# Altium PCB PCB1.PcbDoc (part 5 of 6)
Units mil, origin at the board's own origin, x right, y up, seen from the top; angles counter-clockwise.
Board outline 1280 x 1960 mil, 2 copper layers (Top Layer, Bottom Layer); 45 components, 63 nets, 326 pads, 83 vias.
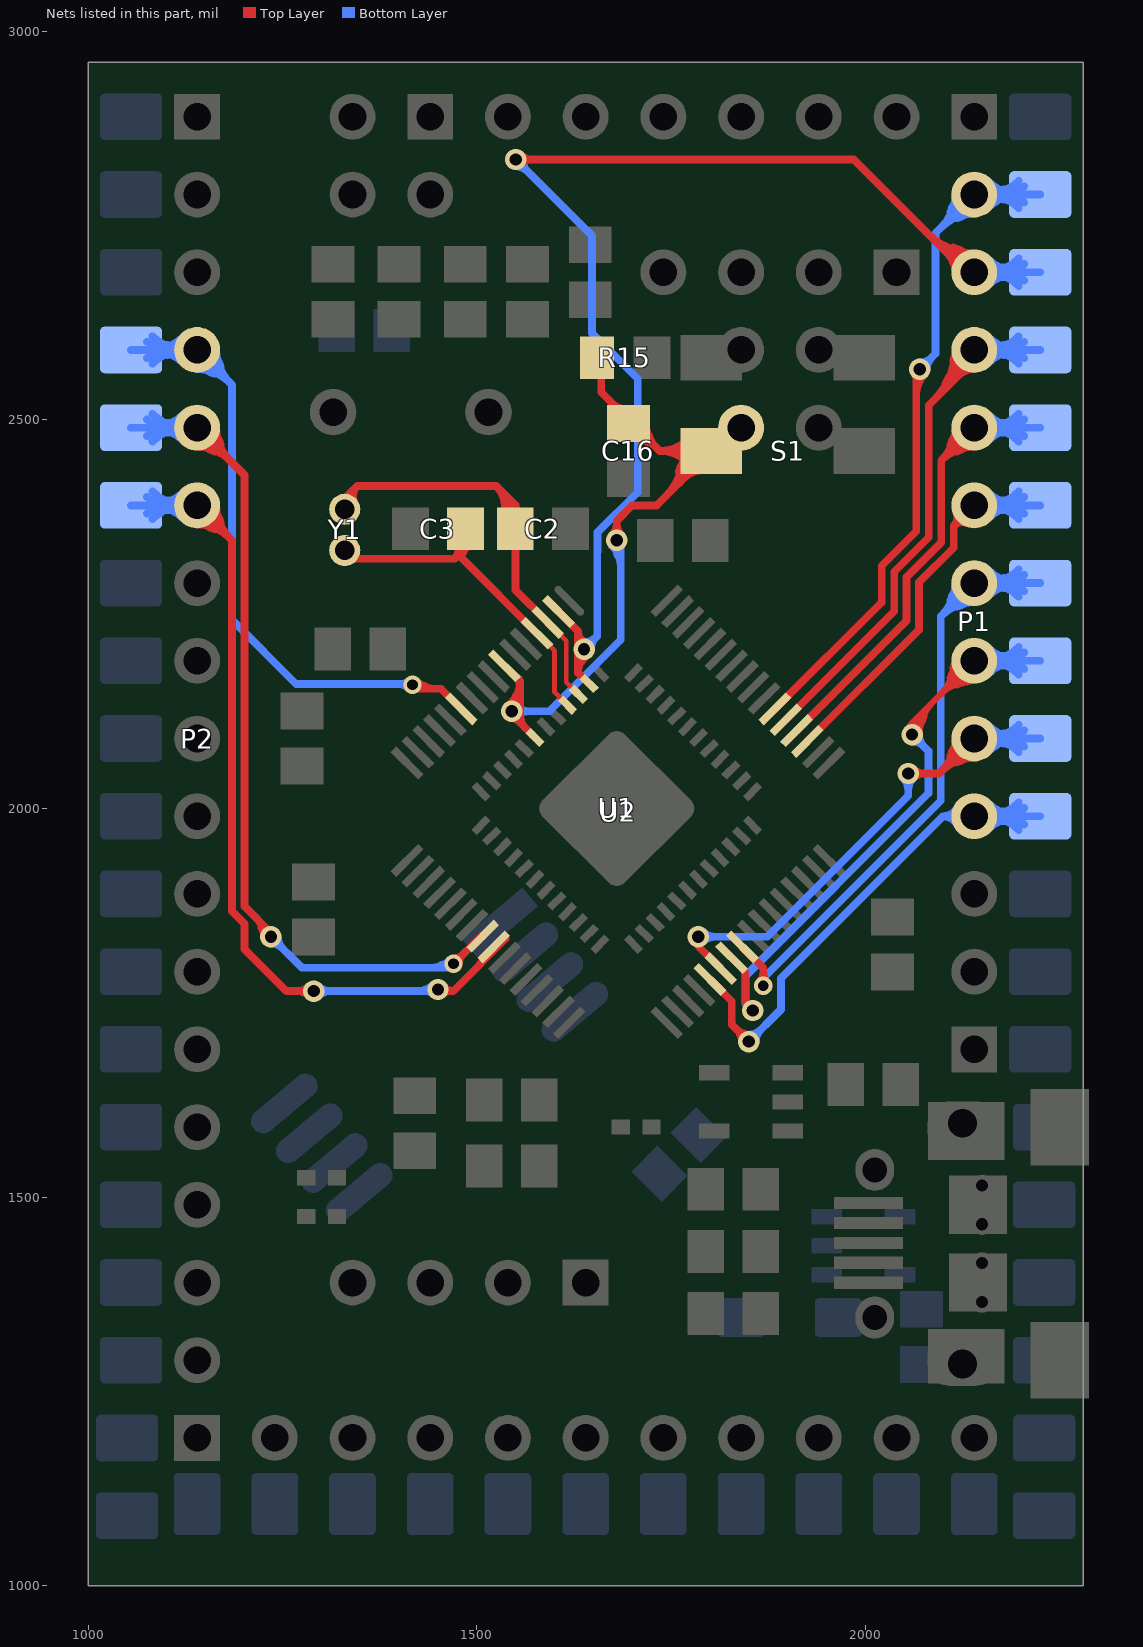
[diagram p5: the nets of this part, all layers, seen from the top]

## Via types
v1: diameter 27.56, hole 15.75, Top Layer to Bottom Layer, tented both sides, 79 vias
v2: diameter 23.62, hole 13.78, Top Layer to Bottom Layer, tented both sides, 3 vias
v3: diameter 23.62, hole 13.78, Top Layer to Bottom Layer, tented top, 1 vias

## Nets (pads, with @x,y where several pads share a name; then routed paths per layer and width w, separated by ;. In a path a pad name is that pad's centre, name@x,y a point inside that pad or via, vN(x,y) a via of type N, cw(c..) or ccw(c..) an arc to the next point about the centre after c; other vN are vias at no path point) (continued)
PC3: P2.4 pad.1@1055,2590 U2.11 | length 2228.7
  Top Layer w10: v2@1418.05,2160 v2(1417.18,2159.13) 1422.15,2154.16 1453.73,2154.16 U2.11@1479.84,2128.04 ; v2@1422.59,2154.99 cw(c1429.4,2149.76) 1433.69,2157.2 ; v2@1422,2163.95 ccw(c1445.63,2187.58) 1445.63,2154.16 cw(c1445.63,2187.58) v2@1422,2163.95
  Bottom Layer w10: pad.1@1055,2590 P2.4@1140,2590 1185,2545 1185,2242.63 1267.63,2160 1420,2160 1419.13,2159.13 v2(1417.18,2159.13) ; P2.4@1116.78,2582.1 ccw(c1095.78,2574.96) 1101.52,2596.39 ccw(c1105.72,2612.07) P2.4@1119.38,2603.28 ; P2.4@1116.78,2597.9 cw(c1095.78,2605.04) 1101.52,2583.61 cw(c1105.72,2567.93) P2.4@1119.38,2576.72 ; P2.4@1134.64,2588.9 ccw(c1172.3,2596.61) 1162.35,2559.48 ; P2.4@1141.1,2595.36 cw(c1133.39,2557.7) 1170.52,2567.65 ; pad.1@1080.79,2590 cw(c1080.79,2530.79) 1122.66,2572.66 ccw(c1080.79,2530.79) pad.1@1080.79,2590 ; pad.1@1080.79,2590 ccw(c1080.79,2649.21) 1122.66,2607.34 cw(c1080.79,2649.21) pad.1@1080.79,2590 ; pad.1@1086.36,2577.01 cw(c1099.56,2568.97) 1103.56,2583.9 ; pad.1@1086.36,2577.01 cw(c1099.56,2568.97) 1103.56,2583.9 ; pad.1@1086.36,2577.01 cw(c1099.56,2568.97) 1103.56,2583.9 ; pad.1@1086.36,2602.99 ccw(c1099.56,2611.03) 1103.56,2596.1 ; pad.1@1086.36,2602.99 ccw(c1099.56,2611.03) 1103.56,2596.1 ; pad.1@1086.36,2602.99 ccw(c1099.56,2611.03) 1103.56,2596.1 ; pad.1@1088.73,2582.12 cw(c1109.12,2575.35) 1103.56,2596.1 ; pad.1@1088.73,2582.12 cw(c1109.12,2575.35) 1103.56,2596.1 ; pad.1@1088.73,2582.12 cw(c1109.12,2575.35) 1103.56,2596.1 ; pad.1@1088.73,2597.88 ccw(c1109.12,2604.65) 1103.56,2583.9 ; pad.1@1088.73,2597.88 ccw(c1109.12,2604.65) 1103.56,2583.9 ; pad.1@1088.73,2597.88 ccw(c1109.12,2604.65) 1103.56,2583.9 ; 1101.21,2590 cw(c1101.21,2626.21) 1075.61,2600.61 ccw(c1101.21,2626.21) 1101.21,2590 ; 1101.21,2590 ccw(c1101.21,2553.79) 1075.61,2579.39 cw(c1101.21,2553.79) 1101.21,2590 ; 1104.93,2590 cw(c1104.93,2554.93) 1129.73,2579.73 ccw(c1104.93,2554.93) 1104.93,2590 ; 1104.93,2590 ccw(c1104.93,2625.07) 1129.73,2600.27 cw(c1104.93,2625.07) 1104.93,2590 ; P2.4@1125.36,2590 cw(c1125.36,2650.36) 1082.68,2607.68 ccw(c1125.36,2650.36) P2.4@1125.36,2590 ; P2.4@1125.36,2590 ccw(c1125.36,2529.64) 1082.68,2572.32 cw(c1125.36,2529.64) P2.4@1125.36,2590 ; 1164.8,2565.2 cw(c1189.6,2590) 1154.53,2590 ccw(c1189.6,2590) 1164.8,2565.2 ; 1164.8,2565.2 ccw(c1140,2540.4) 1140,2575.47 cw(c1140,2540.4) 1164.8,2565.2 ; 1181.87,2548.13 cw(c1223.74,2590) 1164.53,2590 ccw(c1223.74,2590) 1181.87,2548.13 ; 1181.87,2548.13 ccw(c1140,2506.26) 1140,2565.47 cw(c1140,2506.26) 1181.87,2548.13 ; 1398.64,2160 cw(c1398.64,2140.59) 1412.37,2154.31 ccw(c1398.64,2140.59) 1398.64,2160 ; 1402.84,2160 ccw(c1402.84,2173.48) 1412.37,2163.95 cw(c1402.84,2173.48) 1402.84,2160
PC4: P2.5 pad.1@1055,2490 U2.24 | length 2668.8
  Top Layer w10: P2.5@1134.64,2488.9 ccw(c1172.3,2496.61) 1162.35,2459.48 ; P2.5@1140,2490 1201,2429 1201,1874.25 v1@1235,1840.25 ; P2.5@1141.1,2495.36 cw(c1133.39,2457.7) 1170.52,2467.65 ; 1223.05,1846.82 ccw(c1241.75,1851.83) v1@1234.55,1833.87 ; v2(1470,1800) 1505.73,1835.73 U2.24@1507.68,1835.73 ; 1164.8,2465.2 cw(c1189.6,2490) 1154.53,2490 ccw(c1189.6,2490) 1164.8,2465.2 ; 1164.8,2465.2 ccw(c1140,2440.4) 1140,2475.47 cw(c1140,2440.4) 1164.8,2465.2 ; 1181.87,2448.13 cw(c1223.74,2490) 1164.53,2490 ccw(c1223.74,2490) 1181.87,2448.13 ; 1181.87,2448.13 ccw(c1140,2406.26) 1140,2465.47 cw(c1140,2406.26) 1181.87,2448.13 ; 1481.63,1811.63 cw(c1470,1823.25) 1470,1806.81 ccw(c1470,1823.25) 1481.63,1811.63 ; 1481.63,1811.63 ccw(c1493.25,1800) 1476.81,1800 cw(c1493.25,1800) 1481.63,1811.63 ; 1216.3,1858.96 cw(c1192.34,1835) 1226.22,1835 ccw(c1192.34,1835) 1216.3,1858.96
  Bottom Layer w10: pad.1@1055,2490 P2.5@1140,2490 1145,2485 P2.5@1145,2470 ; P2.5@1116.78,2482.1 ccw(c1095.78,2474.96) 1101.52,2496.39 ccw(c1105.72,2512.07) P2.5@1119.38,2503.28 ; P2.5@1116.78,2497.9 cw(c1095.78,2505.04) 1101.52,2483.61 cw(c1105.72,2467.93) P2.5@1119.38,2476.72 ; v1(1235,1835) 1275,1795 1465,1795 v2(1470,1800) ; 1453.45,1798.04 cw(c1457.77,1790.56) v2@1464.61,1795.84 ; pad.1@1080.79,2490 cw(c1080.79,2430.79) 1122.66,2472.66 ccw(c1080.79,2430.79) pad.1@1080.79,2490 ; pad.1@1080.79,2490 ccw(c1080.79,2549.21) 1122.66,2507.34 cw(c1080.79,2549.21) pad.1@1080.79,2490 ; pad.1@1086.36,2477.01 cw(c1099.56,2468.97) 1103.56,2483.9 ; pad.1@1086.36,2477.01 cw(c1099.56,2468.97) 1103.56,2483.9 ; pad.1@1086.36,2477.01 cw(c1099.56,2468.97) 1103.56,2483.9 ; pad.1@1086.36,2502.99 ccw(c1099.56,2511.03) 1103.56,2496.1 ; pad.1@1086.36,2502.99 ccw(c1099.56,2511.03) 1103.56,2496.1 ; pad.1@1086.36,2502.99 ccw(c1099.56,2511.03) 1103.56,2496.1 ; pad.1@1088.73,2482.12 cw(c1109.12,2475.35) 1103.56,2496.1 ; pad.1@1088.73,2482.12 cw(c1109.12,2475.35) 1103.56,2496.1 ; pad.1@1088.73,2482.12 cw(c1109.12,2475.35) 1103.56,2496.1 ; pad.1@1088.73,2497.88 ccw(c1109.12,2504.65) 1103.56,2483.9 ; pad.1@1088.73,2497.88 ccw(c1109.12,2504.65) 1103.56,2483.9 ; pad.1@1088.73,2497.88 ccw(c1109.12,2504.65) 1103.56,2483.9 ; 1101.21,2490 cw(c1101.21,2526.21) 1075.61,2500.61 ccw(c1101.21,2526.21) 1101.21,2490 ; 1101.21,2490 ccw(c1101.21,2453.79) 1075.61,2479.39 cw(c1101.21,2453.79) 1101.21,2490 ; 1104.93,2490 cw(c1104.93,2454.93) 1129.73,2479.73 ccw(c1104.93,2454.93) 1104.93,2490 ; 1104.93,2490 ccw(c1104.93,2525.07) 1129.73,2500.27 cw(c1104.93,2525.07) 1104.93,2490 ; P2.5@1125.36,2490 cw(c1125.36,2550.36) 1082.68,2507.68 ccw(c1125.36,2550.36) P2.5@1125.36,2490 ; P2.5@1125.36,2490 ccw(c1125.36,2429.64) 1082.68,2472.32 cw(c1125.36,2429.64) P2.5@1125.36,2490 ; 1249.99,1820.01 cw(c1264.98,1835) 1243.78,1835 ccw(c1264.98,1835) 1249.99,1820.01 ; 1249.99,1820.01 ccw(c1235,1805.02) 1235,1826.22 cw(c1235,1805.02) 1249.99,1820.01 ; 1441.49,1795 ccw(c1441.49,1828.51) 1465.18,1804.82 cw(c1441.49,1828.51) 1441.49,1795
PC5: P2.6 pad.1@1055,2390 U2.25 | length 2638.6
  Top Layer w10: P2.6@1134.64,2388.9 ccw(c1172.3,2396.61) 1162.35,2359.48 ; P2.6@1140,2390 1185,2345 1185,1867.63 1201,1851.63 1201,1819 1255,1765 v1(1290,1765) ; P2.6@1141.1,2395.36 cw(c1133.39,2357.7) 1170.52,2367.65 ; v1@1450,1765 1469.45,1765 ; U2.25@1537.22,1832.78 1469.45,1765 ; 1164.8,2365.2 cw(c1189.6,2390) 1154.53,2390 ccw(c1189.6,2390) 1164.8,2365.2 ; 1164.8,2365.2 ccw(c1140,2340.4) 1140,2375.47 cw(c1140,2340.4) 1164.8,2365.2 ; 1181.87,2348.13 cw(c1223.74,2390) 1164.53,2390 ccw(c1223.74,2390) 1181.87,2348.13 ; 1181.87,2348.13 ccw(c1140,2306.26) 1140,2365.47 cw(c1140,2306.26) 1181.87,2348.13 ; 1268.8,1765 cw(c1268.8,1743.8) 1283.79,1758.79 ccw(c1268.8,1743.8) 1268.8,1765 ; 1268.8,1765 ccw(c1268.8,1786.2) 1283.79,1771.21 cw(c1268.8,1786.2) 1268.8,1765 ; 1469.45,1765 cw(c1469.45,1779.15) 1457.45,1771.65 ccw(c1469.45,1779.15) 1469.45,1765 ; v1@1456.21,1760.79 cw(c1466.37,1750.63) 1466.37,1765 ccw(c1466.37,1750.63) v1@1456.21,1760.79 ; 1504.16,1799.72 ccw(c1496.21,1807.67) 1507.46,1807.67 cw(c1496.21,1807.67) 1504.16,1799.72
  Bottom Layer w10: pad.1@1055,2390 P2.6@1140,2390 ; P2.6@1116.78,2382.1 ccw(c1095.78,2374.96) 1101.52,2396.39 ccw(c1105.72,2412.07) P2.6@1119.38,2403.28 ; P2.6@1116.78,2397.9 cw(c1095.78,2405.04) 1101.52,2383.61 cw(c1105.72,2367.93) P2.6@1119.38,2376.72 ; v1(1290,1765) v1@1440,1765 ; pad.1@1080.79,2390 cw(c1080.79,2330.79) 1122.66,2372.66 ccw(c1080.79,2330.79) pad.1@1080.79,2390 ; pad.1@1080.79,2390 ccw(c1080.79,2449.21) 1122.66,2407.34 cw(c1080.79,2449.21) pad.1@1080.79,2390 ; pad.1@1086.36,2377.01 cw(c1099.56,2368.97) 1103.56,2383.9 ; pad.1@1086.36,2377.01 cw(c1099.56,2368.97) 1103.56,2383.9 ; pad.1@1086.36,2377.01 cw(c1099.56,2368.97) 1103.56,2383.9 ; pad.1@1086.36,2402.99 ccw(c1099.56,2411.03) 1103.56,2396.1 ; pad.1@1086.36,2402.99 ccw(c1099.56,2411.03) 1103.56,2396.1 ; pad.1@1086.36,2402.99 ccw(c1099.56,2411.03) 1103.56,2396.1 ; pad.1@1088.73,2382.12 cw(c1109.12,2375.35) 1103.56,2396.1 ; pad.1@1088.73,2382.12 cw(c1109.12,2375.35) 1103.56,2396.1 ; pad.1@1088.73,2382.12 cw(c1109.12,2375.35) 1103.56,2396.1 ; pad.1@1088.73,2397.88 ccw(c1109.12,2404.65) 1103.56,2383.9 ; pad.1@1088.73,2397.88 ccw(c1109.12,2404.65) 1103.56,2383.9 ; pad.1@1088.73,2397.88 ccw(c1109.12,2404.65) 1103.56,2383.9 ; 1101.21,2390 cw(c1101.21,2426.21) 1075.61,2400.61 ccw(c1101.21,2426.21) 1101.21,2390 ; 1101.21,2390 ccw(c1101.21,2353.79) 1075.61,2379.39 cw(c1101.21,2353.79) 1101.21,2390 ; 1104.93,2390 cw(c1104.93,2354.93) 1129.73,2379.73 ccw(c1104.93,2354.93) 1104.93,2390 ; 1104.93,2390 ccw(c1104.93,2425.07) 1129.73,2400.27 cw(c1104.93,2425.07) 1104.93,2390 ; P2.6@1125.36,2390 cw(c1125.36,2450.36) 1082.68,2407.68 ccw(c1125.36,2450.36) P2.6@1125.36,2390 ; P2.6@1125.36,2390 ccw(c1125.36,2329.64) 1082.68,2372.32 cw(c1125.36,2329.64) P2.6@1125.36,2390 ; 1311.2,1765 cw(c1311.2,1786.2) 1296.21,1771.21 ccw(c1311.2,1786.2) 1311.2,1765 ; 1311.2,1765 ccw(c1311.2,1743.8) 1296.21,1758.79 cw(c1311.2,1743.8) 1311.2,1765 ; 1423.98,1765 ccw(c1423.98,1793.02) 1443.79,1773.21 cw(c1423.98,1793.02) 1423.98,1765 ; 1433.63,1765 cw(c1433.63,1750.63) 1443.79,1760.79 ccw(c1433.63,1750.63) 1433.63,1765
  other v1: 1450,1767
PC6: P1.4 pad.1@2225,1990 U2.37 | length 1805.9
  Top Layer w10: U2.37@1799.99,1780.06 1828,1752.05 1828,1722 v1(1850,1700) ; 1838.77,1709.15 ccw(c1852.64,1712.87) v1@1849.76,1698.8 ; 1840.85,1711.23 cw(c1837.13,1697.36) v1@1851.2,1700.24 ; 1835.01,1714.99 cw(c1820.02,1700) 1841.22,1700 ccw(c1820.02,1700) 1835.01,1714.99 ; 1835.01,1714.99 ccw(c1850,1729.98) 1850,1708.78 cw(c1850,1729.98) 1835.01,1714.99
  Bottom Layer w10: v1(1850,1700) 1891.37,1741.33 1891.37,1781.45 1910,1800.08 1910,1800.22 2099.78,1990 ; P1.4@2160.62,1976.72 cw(c2174.28,1967.93) 2178.48,1983.61 cw(c2184.22,2005.04) P1.4@2163.22,1997.9 ; P1.4@2160.62,2003.28 ccw(c2174.28,2012.07) 2178.48,1996.39 ccw(c2184.22,1974.96) P1.4@2163.22,1982.1 ; pad.1@2225,1990 P1.4@2140,1990 2099.78,1990 ; 2099.78,1990 cw(c2099.78,1969.28) 2118.19,1978.77 ccw(c2099.78,1969.28) 2099.78,1990 ; 2099.78,1990 ccw(c2099.78,2010.72) 2118.19,2001.23 cw(c2099.78,2010.72) 2099.78,1990 ; P1.4@2154.64,1990 cw(c2154.64,1929.64) 2197.32,1972.32 ccw(c2154.64,1929.64) P1.4@2154.64,1990 ; P1.4@2154.64,1990 ccw(c2154.64,2050.36) 2197.32,2007.68 cw(c2154.64,2050.36) P1.4@2154.64,1990 ; 2175.07,1990 cw(c2175.07,2025.07) 2150.27,2000.27 ccw(c2175.07,2025.07) 2175.07,1990 ; 2175.07,1990 ccw(c2175.07,1954.93) 2150.27,1979.73 cw(c2175.07,1954.93) 2175.07,1990 ; 2176.44,1983.9 cw(c2180.44,1968.97) pad.1@2193.64,1977.01 ; 2176.44,1983.9 ccw(c2170.88,2004.65) pad.1@2191.27,1997.88 ; 2176.44,1983.9 cw(c2180.44,1968.97) pad.1@2193.64,1977.01 ; 2176.44,1983.9 ccw(c2170.88,2004.65) pad.1@2191.27,1997.88 ; 2176.44,1983.9 cw(c2180.44,1968.97) pad.1@2193.64,1977.01 ; 2176.44,1983.9 ccw(c2170.88,2004.65) pad.1@2191.27,1997.88 ; 2176.44,1996.1 cw(c2170.88,1975.35) pad.1@2191.27,1982.12 ; 2176.44,1996.1 ccw(c2180.44,2011.03) pad.1@2193.64,2002.99 ; 2176.44,1996.1 cw(c2170.88,1975.35) pad.1@2191.27,1982.12 ; 2176.44,1996.1 ccw(c2180.44,2011.03) pad.1@2193.64,2002.99 ; 2176.44,1996.1 cw(c2170.88,1975.35) pad.1@2191.27,1982.12 ; 2176.44,1996.1 ccw(c2180.44,2011.03) pad.1@2193.64,2002.99 ; 2178.79,1990 cw(c2178.79,1953.79) 2204.39,1979.39 ccw(c2178.79,1953.79) 2178.79,1990 ; 2178.79,1990 ccw(c2178.79,2026.21) 2204.39,2000.61 cw(c2178.79,2026.21) 2178.79,1990 ; pad.1@2199.21,1990 cw(c2199.21,2049.21) 2157.34,2007.34 ccw(c2199.21,2049.21) pad.1@2199.21,1990 ; pad.1@2199.21,1990 ccw(c2199.21,1930.79) 2157.34,1972.66 cw(c2199.21,1930.79) pad.1@2199.21,1990 ; v1@1850,1708.78 ccw(c1850,1730.08) 1865.06,1715.02 cw(c1850,1730.08) v1@1850,1708.78 ; v1@1858.78,1700 cw(c1879.87,1700) 1864.96,1714.91 ccw(c1879.87,1700) v1@1858.78,1700
PC7: P1.5 pad.1@2225,2090 U2.38 | length 2127.3
  Top Layer w10: v1(1785,1835) 1785,1822.88 U2.38@1813.91,1793.98 ; v1(2055,2045) 2095,2045 P1.5@2140,2090 ; 2109.48,2067.65 cw(c2146.61,2057.7) P1.5@2138.9,2095.36 ; 2117.65,2059.48 ccw(c2107.7,2096.61) P1.5@2145.36,2088.9 ; 2076.2,2045 cw(c2076.2,2066.2) 2061.21,2051.21 ccw(c2076.2,2066.2) 2076.2,2045 ; 2076.2,2045 ccw(c2076.2,2023.8) 2061.21,2038.79 cw(c2076.2,2023.8) 2076.2,2045 ; 2098.13,2048.13 cw(c2140,2006.26) 2140,2065.47 ccw(c2140,2006.26) 2098.13,2048.13 ; 2098.13,2048.13 ccw(c2056.26,2090) 2115.47,2090 cw(c2056.26,2090) 2098.13,2048.13 ; 2115.2,2065.2 cw(c2140,2040.4) 2140,2075.47 ccw(c2140,2040.4) 2115.2,2065.2 ; 2115.2,2065.2 ccw(c2090.4,2090) 2125.47,2090 cw(c2090.4,2090) 2115.2,2065.2
  Bottom Layer w10: v1(1785,1835) 1873.79,1835 2055,2016.21 v1(2055,2045) ; P1.5@2140,2090 pad.1@2225,2090 ; P1.5@2160.62,2076.72 cw(c2174.28,2067.93) 2178.48,2083.61 cw(c2184.22,2105.04) P1.5@2163.22,2097.9 ; P1.5@2160.62,2103.28 ccw(c2174.28,2112.07) 2178.48,2096.39 ccw(c2184.22,2074.96) P1.5@2163.22,2082.1 ; 1806.2,1835 cw(c1806.2,1856.2) 1791.21,1841.21 ccw(c1806.2,1856.2) 1806.2,1835 ; 1806.2,1835 ccw(c1806.2,1813.8) 1791.21,1828.79 cw(c1806.2,1813.8) 1806.2,1835 ; 2055,2023.8 cw(c2076.2,2023.8) 2061.21,2038.79 ccw(c2076.2,2023.8) 2055,2023.8 ; 2055,2023.8 ccw(c2033.8,2023.8) 2048.79,2038.79 cw(c2033.8,2023.8) 2055,2023.8 ; P1.5@2154.64,2090 cw(c2154.64,2029.64) 2197.32,2072.32 ccw(c2154.64,2029.64) P1.5@2154.64,2090 ; P1.5@2154.64,2090 ccw(c2154.64,2150.36) 2197.32,2107.68 cw(c2154.64,2150.36) P1.5@2154.64,2090 ; 2175.07,2090 cw(c2175.07,2125.07) 2150.27,2100.27 ccw(c2175.07,2125.07) 2175.07,2090 ; 2175.07,2090 ccw(c2175.07,2054.93) 2150.27,2079.73 cw(c2175.07,2054.93) 2175.07,2090 ; 2176.44,2083.9 cw(c2180.44,2068.97) pad.1@2193.64,2077.01 ; 2176.44,2083.9 ccw(c2170.88,2104.65) pad.1@2191.27,2097.88 ; 2176.44,2083.9 cw(c2180.44,2068.97) pad.1@2193.64,2077.01 ; 2176.44,2083.9 ccw(c2170.88,2104.65) pad.1@2191.27,2097.88 ; 2176.44,2083.9 cw(c2180.44,2068.97) pad.1@2193.64,2077.01 ; 2176.44,2083.9 ccw(c2170.88,2104.65) pad.1@2191.27,2097.88 ; 2176.44,2096.1 cw(c2170.88,2075.35) pad.1@2191.27,2082.12 ; 2176.44,2096.1 ccw(c2180.44,2111.03) pad.1@2193.64,2102.99 ; 2176.44,2096.1 cw(c2170.88,2075.35) pad.1@2191.27,2082.12 ; 2176.44,2096.1 ccw(c2180.44,2111.03) pad.1@2193.64,2102.99 ; 2176.44,2096.1 cw(c2170.88,2075.35) pad.1@2191.27,2082.12 ; 2176.44,2096.1 ccw(c2180.44,2111.03) pad.1@2193.64,2102.99 ; 2178.79,2090 cw(c2178.79,2053.79) 2204.39,2079.39 ccw(c2178.79,2053.79) 2178.79,2090 ; 2178.79,2090 ccw(c2178.79,2126.21) 2204.39,2100.61 cw(c2178.79,2126.21) 2178.79,2090 ; pad.1@2199.21,2090 cw(c2199.21,2149.21) 2157.34,2107.34 ccw(c2199.21,2149.21) pad.1@2199.21,2090 ; pad.1@2199.21,2090 ccw(c2199.21,2030.79) 2157.34,2072.66 cw(c2199.21,2030.79) pad.1@2199.21,2090
PC8: P1.6 pad.1@2225,2190 U2.39 | length 2990.8
  Top Layer w8: v1@2055.94,2103.9 ccw(c2046.85,2123.79) 2067.98,2118.13 ; v1@2059.11,2096.54 ccw(c2040.84,2128.19) 2076.14,2118.73 ; v1(2060,2095) 2060,2110 ; 2066.7,2113.35 ccw(c2083.83,2108.76) v1@2068.47,2099.89 ; 2105.21,2155.45 cw(c2149.51,2143.58) P1.6@2140.31,2188.5 ; 2105.45,2155.21 ccw(c2093.58,2199.51) P1.6@2138.5,2190.31 ; 2108.57,2167.96 cw(c2146.6,2157.76) P1.6@2138.7,2196.34 ; 2111.27,2162 cw(c2130.54,2151.85) P1.6@2135.78,2172.99 ; 2111.92,2180.46 cw(c2143.7,2171.95) P1.6@2137.1,2204.18 ; 2112,2161.27 ccw(c2101.85,2180.54) P1.6@2122.99,2185.78 ; 2114.25,2167.66 ccw(c2097.1,2176.7) P1.6@2115.62,2182.44 ; P1.6@2115.59,2182.53 cw(c2094.02,2175.92) 2110.08,2160.08 ; P1.6@2115.64,2182.38 cw(c2094.58,2175.79) 2110.08,2160.08 ; P1.6@2115.68,2182.24 cw(c2095.07,2175.67) 2110.47,2160.47 ; P1.6@2115.73,2182.09 cw(c2095.61,2175.53) 2110.47,2160.47 ; 2116.03,2171.03 cw(c2133.07,2162.06) P1.6@2137.71,2180.75 ; 2117.66,2164.25 cw(c2126.7,2147.1) P1.6@2132.44,2165.62 ; 2117.96,2158.57 ccw(c2107.76,2196.6) P1.6@2146.34,2188.7 ; 2121.03,2166.03 ccw(c2112.06,2183.07) P1.6@2130.75,2187.71 ; 2130.46,2161.92 ccw(c2121.95,2193.7) P1.6@2154.18,2187.1 ; P1.6@2132.09,2165.73 ccw(c2125.53,2145.61) 2110.47,2160.47 ; P1.6@2132.24,2165.68 ccw(c2125.67,2145.07) 2110.47,2160.47 ; P1.6@2132.38,2165.64 ccw(c2125.79,2144.58) 2110.08,2160.08 ; P1.6@2132.53,2165.59 ccw(c2125.92,2144.02) 2110.08,2160.08 ; P1.6@2140,2190 2060,2110 ; 2059.99,2109.99 ccw(c2074.98,2095) 2053.78,2095 cw(c2074.98,2095) 2059.99,2109.99 ; 2060,2110 cw(c2053.39,2110) 2056.05,2103.95 ccw(c2053.39,2110) 2060,2110 ; 2060,2110 ccw(c2066.61,2110) 2063.95,2103.95 cw(c2066.61,2110) 2060,2110 ; 2096.42,2146.42 cw(c2140,2102.84) 2140,2164.47 ccw(c2140,2102.84) 2096.42,2146.42 ; 2096.42,2146.42 ccw(c2052.84,2190) 2114.47,2190 cw(c2052.84,2190) 2096.42,2146.42 ; 2110.08,2160.08 cw(c2140,2130.16) 2140,2172.47 ccw(c2140,2130.16) 2110.08,2160.08 ; 2110.08,2160.08 ccw(c2080.16,2190) 2122.47,2190 cw(c2080.16,2190) 2110.08,2160.08 ; v1@2061.78,2095 cw(c2102.29,2095) 2073.64,2123.64 ccw(c2102.29,2095) v1@2061.78,2095 ; v1@2069.78,2095 cw(c2129.6,2095) 2087.3,2137.3 ccw(c2129.6,2095) v1@2069.78,2095
  Top Layer w9: U2.39@1827.83,1807.9 1845.62,1790.1 1845.62,1749.38 v1(1855,1740) ; U2.39@1841.62,1793.4 cw(c1831.95,1783.73) 1845.62,1783.73 ccw(c1831.95,1783.73) U2.39@1841.62,1793.4 ; U2.39@1841.86,1793.27 cw(c1840.83,1788.59) 1845.62,1788.59 ccw(c1840.83,1788.59) U2.39@1841.86,1793.27
  Bottom Layer w10: v1(1855,1740) 1845.75,1749.25 1845.75,1784.34 2081,2019.59 2081,2074 v1(2060,2095) ; P1.6@2140,2190 pad.1@2225,2190 ; P1.6@2160.62,2176.72 cw(c2174.28,2167.93) 2178.48,2183.61 cw(c2184.22,2205.04) P1.6@2163.22,2197.9 ; P1.6@2160.62,2203.28 ccw(c2174.28,2212.07) 2178.48,2196.39 ccw(c2184.22,2174.96) P1.6@2163.22,2182.1 ; 2074.99,2080.01 cw(c2089.98,2095) 2068.78,2095 ccw(c2089.98,2095) 2074.99,2080.01 ; 2074.99,2080.01 ccw(c2060,2065.02) 2060,2086.22 cw(c2060,2065.02) 2074.99,2080.01 ; P1.6@2154.64,2190 cw(c2154.64,2129.64) 2197.32,2172.32 ccw(c2154.64,2129.64) P1.6@2154.64,2190 ; P1.6@2154.64,2190 ccw(c2154.64,2250.36) 2197.32,2207.68 cw(c2154.64,2250.36) P1.6@2154.64,2190 ; 2175.07,2190 cw(c2175.07,2225.07) 2150.27,2200.27 ccw(c2175.07,2225.07) 2175.07,2190 ; 2175.07,2190 ccw(c2175.07,2154.93) 2150.27,2179.73 cw(c2175.07,2154.93) 2175.07,2190 ; 2176.44,2183.9 cw(c2180.44,2168.97) pad.1@2193.64,2177.01 ; 2176.44,2183.9 ccw(c2170.88,2204.65) pad.1@2191.27,2197.88 ; 2176.44,2183.9 cw(c2180.44,2168.97) pad.1@2193.64,2177.01 ; 2176.44,2183.9 ccw(c2170.88,2204.65) pad.1@2191.27,2197.88 ; 2176.44,2183.9 cw(c2180.44,2168.97) pad.1@2193.64,2177.01 ; 2176.44,2183.9 ccw(c2170.88,2204.65) pad.1@2191.27,2197.88 ; 2176.44,2196.1 cw(c2170.88,2175.35) pad.1@2191.27,2182.12 ; 2176.44,2196.1 ccw(c2180.44,2211.03) pad.1@2193.64,2202.99 ; 2176.44,2196.1 cw(c2170.88,2175.35) pad.1@2191.27,2182.12 ; 2176.44,2196.1 ccw(c2180.44,2211.03) pad.1@2193.64,2202.99 ; 2176.44,2196.1 cw(c2170.88,2175.35) pad.1@2191.27,2182.12 ; 2176.44,2196.1 ccw(c2180.44,2211.03) pad.1@2193.64,2202.99 ; 2178.79,2190 cw(c2178.79,2153.79) 2204.39,2179.39 ccw(c2178.79,2153.79) 2178.79,2190 ; 2178.79,2190 ccw(c2178.79,2226.21) 2204.39,2200.61 cw(c2178.79,2226.21) 2178.79,2190 ; pad.1@2199.21,2190 cw(c2199.21,2249.21) 2157.34,2207.34 ccw(c2199.21,2249.21) pad.1@2199.21,2190 ; pad.1@2199.21,2190 ccw(c2199.21,2130.79) 2157.34,2172.66 cw(c2199.21,2130.79) pad.1@2199.21,2190
PC9: P1.7 pad.1@2225,2290 U2.40 | length 2132
  Top Layer w10: U2.40@1841.75,1821.81 1868.56,1795 v2@1868.56,1780 ; 1868.56,1788.44 cw(c1852.12,1788.44) 1863.75,1776.82 ccw(c1852.12,1788.44) 1868.56,1788.44 ; 1868.56,1788.44 ccw(c1885.01,1788.44) 1873.38,1776.82 cw(c1885.01,1788.44) 1868.56,1788.44
  Bottom Layer w10: v2(1868.56,1772) 1868.56,1781.41 2097,2009.85 2097,2247 P1.7@2140,2290 pad.1@2225,2290 ; 2109.48,2267.65 cw(c2146.61,2257.7) P1.7@2138.9,2295.36 ; 2117.65,2259.48 ccw(c2107.7,2296.61) P1.7@2145.36,2288.9 ; P1.7@2160.62,2276.72 cw(c2174.28,2267.93) 2178.48,2283.61 cw(c2184.22,2305.04) P1.7@2163.22,2297.9 ; P1.7@2160.62,2303.28 ccw(c2174.28,2312.07) 2178.48,2296.39 ccw(c2184.22,2274.96) P1.7@2163.22,2282.1 ; 2098.13,2248.13 cw(c2140,2206.26) 2140,2265.47 ccw(c2140,2206.26) 2098.13,2248.13 ; 2098.13,2248.13 ccw(c2056.26,2290) 2115.47,2290 cw(c2056.26,2290) 2098.13,2248.13 ; 2115.2,2265.2 cw(c2140,2240.4) 2140,2275.47 ccw(c2140,2240.4) 2115.2,2265.2 ; 2115.2,2265.2 ccw(c2090.4,2290) 2125.47,2290 cw(c2090.4,2290) 2115.2,2265.2 ; P1.7@2154.64,2290 cw(c2154.64,2229.64) 2197.32,2272.32 ccw(c2154.64,2229.64) P1.7@2154.64,2290 ; P1.7@2154.64,2290 ccw(c2154.64,2350.36) 2197.32,2307.68 cw(c2154.64,2350.36) P1.7@2154.64,2290 ; 2175.07,2290 cw(c2175.07,2325.07) 2150.27,2300.27 ccw(c2175.07,2325.07) 2175.07,2290 ; 2175.07,2290 ccw(c2175.07,2254.93) 2150.27,2279.73 cw(c2175.07,2254.93) 2175.07,2290 ; 2176.44,2283.9 cw(c2180.44,2268.97) pad.1@2193.64,2277.01 ; 2176.44,2283.9 ccw(c2170.88,2304.65) pad.1@2191.27,2297.88 ; 2176.44,2283.9 cw(c2180.44,2268.97) pad.1@2193.64,2277.01 ; 2176.44,2283.9 ccw(c2170.88,2304.65) pad.1@2191.27,2297.88 ; 2176.44,2283.9 cw(c2180.44,2268.97) pad.1@2193.64,2277.01 ; 2176.44,2283.9 ccw(c2170.88,2304.65) pad.1@2191.27,2297.88 ; 2176.44,2296.1 cw(c2170.88,2275.35) pad.1@2191.27,2282.12 ; 2176.44,2296.1 ccw(c2180.44,2311.03) pad.1@2193.64,2302.99 ; 2176.44,2296.1 cw(c2170.88,2275.35) pad.1@2191.27,2282.12 ; 2176.44,2296.1 ccw(c2180.44,2311.03) pad.1@2193.64,2302.99 ; 2176.44,2296.1 cw(c2170.88,2275.35) pad.1@2191.27,2282.12 ; 2176.44,2296.1 ccw(c2180.44,2311.03) pad.1@2193.64,2302.99 ; 2178.79,2290 cw(c2178.79,2253.79) 2204.39,2279.39 ccw(c2178.79,2253.79) 2178.79,2290 ; 2178.79,2290 ccw(c2178.79,2326.21) 2204.39,2300.61 cw(c2178.79,2326.21) 2178.79,2290 ; pad.1@2199.21,2290 cw(c2199.21,2349.21) 2157.34,2307.34 ccw(c2199.21,2349.21) pad.1@2199.21,2290 ; pad.1@2199.21,2290 ccw(c2199.21,2230.79) 2157.34,2272.66 cw(c2199.21,2230.79) pad.1@2199.21,2290
PC10: P1.8 pad.1@2225,2390 U2.51 | length 1484
  Top Layer w10: U2.51@1925.26,2086.28 2069,2230.02 2069,2291.12 2113.53,2335.65 2113.53,2363.53 ; P1.8@2140,2390 2113.53,2363.53 ; 2113.53,2363.53 cw(c2125.06,2352) 2131.03,2367.17 ccw(c2125.06,2352) 2113.53,2363.53 ; 2113.53,2363.53 ccw(c2102,2375.06) 2117.17,2381.03 cw(c2102,2375.06) 2113.53,2363.53
  Bottom Layer w10: P1.8@2140,2390 pad.1@2225,2390 ; P1.8@2160.62,2376.72 cw(c2174.28,2367.93) 2178.48,2383.61 cw(c2184.22,2405.04) P1.8@2163.22,2397.9 ; P1.8@2160.62,2403.28 ccw(c2174.28,2412.07) 2178.48,2396.39 ccw(c2184.22,2374.96) P1.8@2163.22,2382.1 ; P1.8@2154.64,2390 cw(c2154.64,2329.64) 2197.32,2372.32 ccw(c2154.64,2329.64) P1.8@2154.64,2390 ; P1.8@2154.64,2390 ccw(c2154.64,2450.36) 2197.32,2407.68 cw(c2154.64,2450.36) P1.8@2154.64,2390 ; 2175.07,2390 cw(c2175.07,2425.07) 2150.27,2400.27 ccw(c2175.07,2425.07) 2175.07,2390 ; 2175.07,2390 ccw(c2175.07,2354.93) 2150.27,2379.73 cw(c2175.07,2354.93) 2175.07,2390 ; 2176.44,2383.9 cw(c2180.44,2368.97) pad.1@2193.64,2377.01 ; 2176.44,2383.9 ccw(c2170.88,2404.65) pad.1@2191.27,2397.88 ; 2176.44,2383.9 cw(c2180.44,2368.97) pad.1@2193.64,2377.01 ; 2176.44,2383.9 ccw(c2170.88,2404.65) pad.1@2191.27,2397.88 ; 2176.44,2383.9 cw(c2180.44,2368.97) pad.1@2193.64,2377.01 ; 2176.44,2383.9 ccw(c2170.88,2404.65) pad.1@2191.27,2397.88 ; 2176.44,2396.1 cw(c2170.88,2375.35) pad.1@2191.27,2382.12 ; 2176.44,2396.1 ccw(c2180.44,2411.03) pad.1@2193.64,2402.99 ; 2176.44,2396.1 cw(c2170.88,2375.35) pad.1@2191.27,2382.12 ; 2176.44,2396.1 ccw(c2180.44,2411.03) pad.1@2193.64,2402.99 ; 2176.44,2396.1 cw(c2170.88,2375.35) pad.1@2191.27,2382.12 ; 2176.44,2396.1 ccw(c2180.44,2411.03) pad.1@2193.64,2402.99 ; 2178.79,2390 cw(c2178.79,2353.79) 2204.39,2379.39 ccw(c2178.79,2353.79) 2178.79,2390 ; 2178.79,2390 ccw(c2178.79,2426.21) 2204.39,2400.61 cw(c2178.79,2426.21) 2178.79,2390 ; pad.1@2199.21,2390 cw(c2199.21,2449.21) 2157.34,2407.34 ccw(c2199.21,2449.21) pad.1@2199.21,2390 ; pad.1@2199.21,2390 ccw(c2199.21,2330.79) 2157.34,2372.66 cw(c2199.21,2330.79) pad.1@2199.21,2390
PC11: P1.9 pad.1@2225,2490 U2.52 | length 1881.5
  Top Layer w10: U2.52@1911.34,2100.2 2053,2241.86 2053,2297.75 2097.53,2342.27 2097.53,2447.53 P1.9@2140,2490 ; 2109.48,2467.65 cw(c2146.61,2457.7) P1.9@2138.9,2495.36 ; 2117.65,2459.48 ccw(c2107.7,2496.61) P1.9@2145.36,2488.9 ; 2098.13,2448.13 cw(c2140,2406.26) 2140,2465.47 ccw(c2140,2406.26) 2098.13,2448.13 ; 2098.13,2448.13 ccw(c2056.26,2490) 2115.47,2490 cw(c2056.26,2490) 2098.13,2448.13 ; 2115.2,2465.2 cw(c2140,2440.4) 2140,2475.47 ccw(c2140,2440.4) 2115.2,2465.2 ; 2115.2,2465.2 ccw(c2090.4,2490) 2125.47,2490 cw(c2090.4,2490) 2115.2,2465.2
  Bottom Layer w10: P1.9@2140,2490 pad.1@2225,2490 ; P1.9@2160.62,2476.72 cw(c2174.28,2467.93) 2178.48,2483.61 cw(c2184.22,2505.04) P1.9@2163.22,2497.9 ; P1.9@2160.62,2503.28 ccw(c2174.28,2512.07) 2178.48,2496.39 ccw(c2184.22,2474.96) P1.9@2163.22,2482.1 ; P1.9@2154.64,2490 cw(c2154.64,2429.64) 2197.32,2472.32 ccw(c2154.64,2429.64) P1.9@2154.64,2490 ; P1.9@2154.64,2490 ccw(c2154.64,2550.36) 2197.32,2507.68 cw(c2154.64,2550.36) P1.9@2154.64,2490 ; 2175.07,2490 cw(c2175.07,2525.07) 2150.27,2500.27 ccw(c2175.07,2525.07) 2175.07,2490 ; 2175.07,2490 ccw(c2175.07,2454.93) 2150.27,2479.73 cw(c2175.07,2454.93) 2175.07,2490 ; 2176.44,2483.9 cw(c2180.44,2468.97) pad.1@2193.64,2477.01 ; 2176.44,2483.9 ccw(c2170.88,2504.65) pad.1@2191.27,2497.88 ; 2176.44,2483.9 cw(c2180.44,2468.97) pad.1@2193.64,2477.01 ; 2176.44,2483.9 ccw(c2170.88,2504.65) pad.1@2191.27,2497.88 ; 2176.44,2483.9 cw(c2180.44,2468.97) pad.1@2193.64,2477.01 ; 2176.44,2483.9 ccw(c2170.88,2504.65) pad.1@2191.27,2497.88 ; 2176.44,2496.1 cw(c2170.88,2475.35) pad.1@2191.27,2482.12 ; 2176.44,2496.1 ccw(c2180.44,2511.03) pad.1@2193.64,2502.99 ; 2176.44,2496.1 cw(c2170.88,2475.35) pad.1@2191.27,2482.12 ; 2176.44,2496.1 ccw(c2180.44,2511.03) pad.1@2193.64,2502.99 ; 2176.44,2496.1 cw(c2170.88,2475.35) pad.1@2191.27,2482.12 ; 2176.44,2496.1 ccw(c2180.44,2511.03) pad.1@2193.64,2502.99 ; 2178.79,2490 cw(c2178.79,2453.79) 2204.39,2479.39 ccw(c2178.79,2453.79) 2178.79,2490 ; 2178.79,2490 ccw(c2178.79,2526.21) 2204.39,2500.61 cw(c2178.79,2526.21) 2178.79,2490 ; pad.1@2199.21,2490 cw(c2199.21,2549.21) 2157.34,2507.34 ccw(c2199.21,2549.21) pad.1@2199.21,2490 ; pad.1@2199.21,2490 ccw(c2199.21,2430.79) 2157.34,2472.66 cw(c2199.21,2430.79) pad.1@2199.21,2490
PC12: P1.10 pad.1@2225,2590 U2.53 | length 2135.4
  Top Layer w10: U2.53@1897.43,2114.12 2037,2253.7 2037,2304.37 2081.53,2348.9 2081.53,2518.9 2140,2577.37 P1.10@2140,2590 ; 2102.79,2546.53 cw(c2154.1,2518.27) P1.10@2142.8,2575.75 ; 2106.93,2554.04 cw(c2128.56,2542.12) P1.10@2134.3,2566.14 ; 2113.07,2575.8 cw(c2151.97,2569.22) P1.10@2132.28,2603.41 ; 2118.72,2564.81 cw(c2146.48,2557.37) P1.10@2140.88,2585.56 ; 2123.41,2561.03 ccw(c2115.71,2589.78) P1.10@2145.47,2590.05 ; 2089.2,2526.57 ccw(c2025.77,2590) 2115.47,2590 cw(c2025.77,2590) 2089.2,2526.57 ; 2106.27,2543.64 ccw(c2059.91,2590) 2125.47,2590 cw(c2059.91,2590) 2106.27,2543.64 ; 2119.69,2557.06 cw(c2140,2536.74) 2140,2565.47 ccw(c2140,2536.74) 2119.69,2557.06 ; 2123.34,2560.71 ccw(c2094.06,2590) 2135.47,2590 cw(c2094.06,2590) 2123.34,2560.71
  Bottom Layer w10: P1.10@2140,2590 pad.1@2225,2590 ; P1.10@2160.62,2576.72 cw(c2174.28,2567.93) 2178.48,2583.61 cw(c2184.22,2605.04) P1.10@2163.22,2597.9 ; P1.10@2160.62,2603.28 ccw(c2174.28,2612.07) 2178.48,2596.39 ccw(c2184.22,2574.96) P1.10@2163.22,2582.1 ; P1.10@2154.64,2590 cw(c2154.64,2529.64) 2197.32,2572.32 ccw(c2154.64,2529.64) P1.10@2154.64,2590 ; P1.10@2154.64,2590 ccw(c2154.64,2650.36) 2197.32,2607.68 cw(c2154.64,2650.36) P1.10@2154.64,2590 ; 2175.07,2590 cw(c2175.07,2625.07) 2150.27,2600.27 ccw(c2175.07,2625.07) 2175.07,2590 ; 2175.07,2590 ccw(c2175.07,2554.93) 2150.27,2579.73 cw(c2175.07,2554.93) 2175.07,2590 ; 2176.44,2583.9 cw(c2180.44,2568.97) pad.1@2193.64,2577.01 ; 2176.44,2583.9 ccw(c2170.88,2604.65) pad.1@2191.27,2597.88 ; 2176.44,2583.9 cw(c2180.44,2568.97) pad.1@2193.64,2577.01 ; 2176.44,2583.9 ccw(c2170.88,2604.65) pad.1@2191.27,2597.88 ; 2176.44,2583.9 cw(c2180.44,2568.97) pad.1@2193.64,2577.01 ; 2176.44,2583.9 ccw(c2170.88,2604.65) pad.1@2191.27,2597.88 ; 2176.44,2596.1 cw(c2170.88,2575.35) pad.1@2191.27,2582.12 ; 2176.44,2596.1 ccw(c2180.44,2611.03) pad.1@2193.64,2602.99 ; 2176.44,2596.1 cw(c2170.88,2575.35) pad.1@2191.27,2582.12 ; 2176.44,2596.1 ccw(c2180.44,2611.03) pad.1@2193.64,2602.99 ; 2176.44,2596.1 cw(c2170.88,2575.35) pad.1@2191.27,2582.12 ; 2176.44,2596.1 ccw(c2180.44,2611.03) pad.1@2193.64,2602.99 ; 2178.79,2590 cw(c2178.79,2553.79) 2204.39,2579.39 ccw(c2178.79,2553.79) 2178.79,2590 ; 2178.79,2590 ccw(c2178.79,2626.21) 2204.39,2600.61 cw(c2178.79,2626.21) 2178.79,2590 ; pad.1@2199.21,2590 cw(c2199.21,2649.21) 2157.34,2607.34 ccw(c2199.21,2649.21) pad.1@2199.21,2590 ; pad.1@2199.21,2590 ccw(c2199.21,2530.79) 2157.34,2572.66 cw(c2199.21,2530.79) pad.1@2199.21,2590
PC13: P1.11 pad.1@2225,2690 U1.2 U2.2 | length 3278.4
  Top Layer w10: v1(1550,2835) 1985,2835 2130,2690 P1.11@2140,2690 ; U2.2@1605.12,2253.32 1630,2228.43 ; U1.2@1644.51,2160.77 1630,2175.28 1630,2228.43 ; 2094.96,2726.6 cw(c2079.61,2669.3) P1.11@2135.72,2688.53 ; 2110.71,2707.79 ccw(c2141.05,2715.92) P1.11@2139.78,2684.53 ; 2113.09,2721.74 cw(c2101.01,2676.64) P1.11@2145.18,2691.77 ; 2116.33,2710.87 cw(c2109.54,2685.5) P1.11@2135.52,2689.34 ; 1571.2,2835 cw(c1571.2,2856.2) 1556.21,2841.21 ccw(c1571.2,2856.2) 1571.2,2835 ; 1571.2,2835 ccw(c1571.2,2813.8) 1556.21,2828.79 cw(c1571.2,2813.8) 1571.2,2835 ; 1630,2228.43 ccw(c1645.97,2228.43) 1640.83,2213.31 cw(c1645.97,2228.43) 1630,2228.43 ; 1630,2174.22 cw(c1657.84,2174.22) 1642.76,2197.62 ccw(c1657.84,2174.22) 1630,2174.22 ; 1630,2192.56 cw(c1646.02,2192.56) 1637.34,2206.03 ccw(c1646.02,2192.56) 1630,2192.56 ; 2081.06,2738.94 ccw(c2140,2797.88) 2140,2714.53 cw(c2140,2797.88) 2081.06,2738.94 ; 2098.13,2721.87 ccw(c2140,2763.74) 2140,2704.53 cw(c2140,2763.74) 2098.13,2721.87 ; 2105.2,2714.8 cw(c2080.4,2690) 2115.47,2690 ccw(c2080.4,2690) 2105.2,2714.8
  Bottom Layer w10: v1(1550,2835) 1648.22,2736.78 1648.22,2611.48 1707,2552.7 1707,2407.04 1655.22,2355.26 1655.22,2330.22 1655,2330 1655,2222 v1(1638,2205) ; P1.11@2140,2690 pad.1@2225,2690 ; P1.11@2160.62,2676.72 cw(c2174.28,2667.93) 2178.48,2683.61 cw(c2184.22,2705.04) P1.11@2163.22,2697.9 ; P1.11@2160.62,2703.28 ccw(c2174.28,2712.07) 2178.48,2696.39 ccw(c2184.22,2674.96) P1.11@2163.22,2682.1 ; 1564.99,2820.01 cw(c1579.98,2835) 1558.78,2835 ccw(c1579.98,2835) 1564.99,2820.01 ; 1564.99,2820.01 ccw(c1550,2805.02) 1550,2826.22 cw(c1550,2805.02) 1564.99,2820.01 ; 1652.99,2219.99 cw(c1638,2234.98) 1638,2213.78 ccw(c1638,2234.98) 1652.99,2219.99 ; 1652.99,2219.99 ccw(c1667.98,2205) 1646.78,2205 cw(c1667.98,2205) 1652.99,2219.99 ; P1.11@2154.64,2690 cw(c2154.64,2629.64) 2197.32,2672.32 ccw(c2154.64,2629.64) P1.11@2154.64,2690 ; P1.11@2154.64,2690 ccw(c2154.64,2750.36) 2197.32,2707.68 cw(c2154.64,2750.36) P1.11@2154.64,2690 ; 2175.07,2690 cw(c2175.07,2725.07) 2150.27,2700.27 ccw(c2175.07,2725.07) 2175.07,2690 ; 2175.07,2690 ccw(c2175.07,2654.93) 2150.27,2679.73 cw(c2175.07,2654.93) 2175.07,2690 ; 2176.44,2683.9 cw(c2180.44,2668.97) pad.1@2193.64,2677.01 ; 2176.44,2683.9 ccw(c2170.88,2704.65) pad.1@2191.27,2697.88 ; 2176.44,2683.9 cw(c2180.44,2668.97) pad.1@2193.64,2677.01 ; 2176.44,2683.9 ccw(c2170.88,2704.65) pad.1@2191.27,2697.88 ; 2176.44,2683.9 cw(c2180.44,2668.97) pad.1@2193.64,2677.01 ; 2176.44,2683.9 ccw(c2170.88,2704.65) pad.1@2191.27,2697.88 ; 2176.44,2696.1 cw(c2170.88,2675.35) pad.1@2191.27,2682.12 ; 2176.44,2696.1 ccw(c2180.44,2711.03) pad.1@2193.64,2702.99 ; 2176.44,2696.1 cw(c2170.88,2675.35) pad.1@2191.27,2682.12 ; 2176.44,2696.1 ccw(c2180.44,2711.03) pad.1@2193.64,2702.99 ; 2176.44,2696.1 cw(c2170.88,2675.35) pad.1@2191.27,2682.12 ; 2176.44,2696.1 ccw(c2180.44,2711.03) pad.1@2193.64,2702.99 ; 2178.79,2690 cw(c2178.79,2653.79) 2204.39,2679.39 ccw(c2178.79,2653.79) 2178.79,2690 ; 2178.79,2690 ccw(c2178.79,2726.21) 2204.39,2700.61 cw(c2178.79,2726.21) 2178.79,2690 ; pad.1@2199.21,2690 cw(c2199.21,2749.21) 2157.34,2707.34 ccw(c2199.21,2749.21) pad.1@2199.21,2690 ; pad.1@2199.21,2690 ccw(c2199.21,2630.79) 2157.34,2672.66 cw(c2199.21,2630.79) pad.1@2199.21,2690
PC14: C2.2 U1.3 U2.3 Y1.1 | length 904.8
  Top Layer w6: U2.3@1591.2,2239.4 1615,2215.6 1615,2162.44 U1.3@1630.59,2146.85
  Top Layer w10: Y1.1@1330,2385 1330,2399 1346,2415 ; U2.3@1591.2,2239.4 1549.57,2281.03 C2.2@1549.57,2360 1549.57,2390.43 ; 1346,2415 ccw(c1359.22,2401.78) 1343.01,2392.47 cw(c1359.22,2401.78) 1346,2415 ; 1346,2415 1525,2415 ; 1525,2415 cw(c1497.9,2387.89) 1532.67,2371.77 ccw(c1497.9,2387.89) 1525,2415 ; 1525,2415 1549.57,2390.43 ; 1549.57,2390.43 cw(c1540.03,2390.43) 1543.26,2381.46 ccw(c1540.03,2390.43) 1549.57,2390.43 ; 1549.57,2390.43 ccw(c1559.1,2390.43) 1555.87,2381.46 cw(c1559.1,2390.43) 1549.57,2390.43 ; Y1.1@1334.34,2387.49 cw(c1347.48,2395.04) 1336.76,2405.76 ccw(c1347.48,2395.04) Y1.1@1334.34,2387.49 ; 1535.12,2404.88 cw(c1511.73,2381.48) 1541.74,2367.56 ccw(c1511.73,2381.48) 1535.12,2404.88 ; 1545.24,2394.76 cw(c1525.56,2375.07) 1550.82,2363.36 ccw(c1525.56,2375.07) 1545.24,2394.76
PC15: C3.2 U1.4 U2.4 Y1.2 | length 720.5
  Top Layer w6: U2.4@1577.28,2225.48 1600,2202.76 1600,2149.6 U1.4@1616.67,2132.93
  Top Layer w10: Y1.2@1330,2332 1340.56,2321.44 1471.44,2321.44 ; C3.2@1480.43,2360 1480.43,2330.43 ; U2.4@1577.28,2225.48 1480.43,2322.32 1480.43,2330.43 ; 1471.44,2321.44 ccw(c1460.29,2332.6) 1471.82,2343.36 cw(c1460.29,2332.6) 1471.44,2321.44 ; 1471.44,2321.44 1480.43,2330.43 ; C3.2@1474.78,2340.79 cw(c1467.22,2329.95) 1480.43,2329.95 ; C3.2@1474.78,2340.79 cw(c1467.22,2329.95) 1480.43,2329.95 ; C3.2@1474.78,2340.79 cw(c1467.22,2329.95) 1480.43,2329.95 ; C3.2@1474.78,2340.79 cw(c1467.22,2329.95) 1480.43,2329.95 ; 1480.43,2329.95 cw(c1488.05,2329.95) C3.2@1487.29,2337.53 ; 1480.43,2329.95 cw(c1488.05,2329.95) C3.2@1487.29,2337.53 ; 1480.43,2329.95 cw(c1488.05,2329.95) C3.2@1487.29,2337.53 ; 1480.43,2329.95 cw(c1488.05,2329.95) C3.2@1487.29,2337.53 ; C3.2@1472.27,2342.9 cw(c1452.55,2323.18) 1480.43,2323.18 ccw(c1452.55,2323.18) C3.2@1472.27,2342.9 ; 1478.76,2328.76 ccw(c1467.86,2339.66) 1479.13,2350.18 cw(c1467.86,2339.66) 1478.76,2328.76 ; 1480.43,2321.95 cw(c1498.25,2321.95) 1491.98,2338.63 ccw(c1498.25,2321.95) 1480.43,2321.95
PD2: P1.12 pad.1@2225,2790 U2.54 | length 2288.8
  Top Layer w10: U2.54@1883.51,2128.04 2020.23,2264.77 ; 2021,2264.77 2021,2312.1 2065.53,2356.63 2065.53,2560.53 v1(2070,2565) ; 2065.53,2533.01 cw(c2101.99,2533.01) 2076.21,2558.79 ccw(c2101.99,2533.01) 2065.53,2533.01
  Bottom Layer w10: v1(2070,2565) 2090,2585 2090,2740 P1.12@2140,2790 pad.1@2225,2790 ; 2109.48,2767.65 cw(c2146.61,2757.7) P1.12@2138.9,2795.36 ; 2117.65,2759.48 ccw(c2107.7,2796.61) P1.12@2145.36,2788.9 ; P1.12@2160.62,2776.72 cw(c2174.28,2767.93) 2178.48,2783.61 cw(c2184.22,2805.04) P1.12@2163.22,2797.9 ; P1.12@2160.62,2803.28 ccw(c2174.28,2812.07) 2178.48,2796.39 ccw(c2184.22,2774.96) P1.12@2163.22,2782.1 ; 2084.99,2579.99 cw(c2070,2594.98) 2070,2573.78 ccw(c2070,2594.98) 2084.99,2579.99 ; 2084.99,2579.99 ccw(c2099.98,2565) 2078.78,2565 cw(c2099.98,2565) 2084.99,2579.99 ; 2098.13,2748.13 cw(c2140,2706.26) 2140,2765.47 ccw(c2140,2706.26) 2098.13,2748.13 ; 2098.13,2748.13 ccw(c2056.26,2790) 2115.47,2790 cw(c2056.26,2790) 2098.13,2748.13 ; 2115.2,2765.2 cw(c2140,2740.4) 2140,2775.47 ccw(c2140,2740.4) 2115.2,2765.2 ; 2115.2,2765.2 ccw(c2090.4,2790) 2125.47,2790 cw(c2090.4,2790) 2115.2,2765.2 ; P1.12@2154.64,2790 cw(c2154.64,2729.64) 2197.32,2772.32 ccw(c2154.64,2729.64) P1.12@2154.64,2790 ; P1.12@2154.64,2790 ccw(c2154.64,2850.36) 2197.32,2807.68 cw(c2154.64,2850.36) P1.12@2154.64,2790 ; 2175.07,2790 cw(c2175.07,2825.07) 2150.27,2800.27 ccw(c2175.07,2825.07) 2175.07,2790 ; 2175.07,2790 ccw(c2175.07,2754.93) 2150.27,2779.73 cw(c2175.07,2754.93) 2175.07,2790 ; 2176.44,2783.9 cw(c2180.44,2768.97) pad.1@2193.64,2777.01 ; 2176.44,2783.9 ccw(c2170.88,2804.65) pad.1@2191.27,2797.88 ; 2176.44,2783.9 cw(c2180.44,2768.97) pad.1@2193.64,2777.01 ; 2176.44,2783.9 ccw(c2170.88,2804.65) pad.1@2191.27,2797.88 ; 2176.44,2783.9 cw(c2180.44,2768.97) pad.1@2193.64,2777.01 ; 2176.44,2783.9 ccw(c2170.88,2804.65) pad.1@2191.27,2797.88 ; 2176.44,2796.1 cw(c2170.88,2775.35) pad.1@2191.27,2782.12 ; 2176.44,2796.1 ccw(c2180.44,2811.03) pad.1@2193.64,2802.99 ; 2176.44,2796.1 cw(c2170.88,2775.35) pad.1@2191.27,2782.12 ; 2176.44,2796.1 ccw(c2180.44,2811.03) pad.1@2193.64,2802.99 ; 2176.44,2796.1 cw(c2170.88,2775.35) pad.1@2191.27,2782.12 ; 2176.44,2796.1 ccw(c2180.44,2811.03) pad.1@2193.64,2802.99 ; 2178.79,2790 cw(c2178.79,2753.79) 2204.39,2779.39 ccw(c2178.79,2753.79) 2178.79,2790 ; 2178.79,2790 ccw(c2178.79,2826.21) 2204.39,2800.61 cw(c2178.79,2826.21) 2178.79,2790 ; pad.1@2199.21,2790 cw(c2199.21,2849.21) 2157.34,2807.34 ccw(c2199.21,2849.21) pad.1@2199.21,2790 ; pad.1@2199.21,2790 ccw(c2199.21,2730.79) 2157.34,2772.66 cw(c2199.21,2730.79) pad.1@2199.21,2790
RESET: C16.1 pad.0@1840,2490 R15.2 S1.2 U1.7 U2.7 | length 2323.4
  Top Layer w6: U2.7@1535.52,2183.72 U2.7@1544.24,2175 ; U1.7@1571.08,2095 U1.7@1574.91,2091.17
  Top Layer w10: U2.7@1544.24,2175 1555.81,2163.43 1555.81,2110.27 ; v1@1545.41,2126.15 cw(c1539.4,2109.2) 1556.77,2113.86 ; 1551.33,2146.27 ccw(c1560.68,2138.69) v1@1551.61,2130.77 ; U1.7@1571.08,2095 1555.81,2110.27 ; R15.2@1654.57,2580 1660,2574.57 1660,2535.43 1681.28,2514.16 C16.1@1681.28,2505.31 ; v1@1675,2347.17 v1@1680,2352.17 ; v1(1680,2345) v1@1680,2352.17 ; C16.1@1695,2495.43 1700,2495.43 1735.44,2460 ; C16.1@1697.59,2495.13 ccw(c1729.22,2502.26) 1720.83,2470.95 ; C16.1@1699.19,2496.79 cw(c1693.68,2466.82) 1723.11,2474.71 ; 1755.16,2415.07 cw(c1812.25,2399.77) S1.2@1793.19,2455.71 ; 1760.01,2433.16 cw(c1804.98,2421.12) S1.2@1789.97,2465.18 ; S1.2@1801.57,2460 S1.2@1785,2443.43 ; v1@1545,2116.22 cw(c1545,2104.49) 1553.3,2112.78 ; v1@1545,2116.22 cw(c1545,2104.49) 1553.3,2112.78 ; v1@1545,2116.22 cw(c1545,2104.49) 1553.3,2112.78 ; v1@1545,2116.22 cw(c1545,2104.49) 1553.3,2112.78 ; U2.7@1549.66,2169.58 cw(c1534.81,2154.73) 1555.81,2154.73 ccw(c1534.81,2154.73) U2.7@1549.66,2169.58 ; U2.7@1549.66,2169.58 cw(c1546.59,2160.88) 1555.81,2160.88 ccw(c1546.59,2160.88) U2.7@1549.66,2169.58 ; 1555.81,2110.27 cw(c1563.68,2118.13) 1553.24,2121.97 ccw(c1563.68,2118.13) 1555.81,2110.27 ; v1@1680,2352.17 1680,2369.94 1700,2389.94 1731.52,2389.94 S1.2@1785,2443.43 ; 1680,2366.2 cw(c1658.8,2366.2) 1673.79,2351.21 ccw(c1658.8,2366.2) 1680,2366.2 ; 1680,2366.2 ccw(c1701.2,2366.2) 1686.21,2351.21 cw(c1701.2,2366.2) 1680,2366.2 ; 1735.44,2460 cw(c1735.44,2407.66) 1773.77,2443.3 ccw(c1735.44,2407.66) 1735.44,2460 ; 1735.44,2460 ccw(c1735.44,2512.34) 1773.77,2476.7 cw(c1735.44,2512.34) 1735.44,2460 ; 1735.44,2460 1785,2460 S1.2@1785,2443.43 ; 1735.44,2460 1758.39,2460 ; 1758.39,2460 cw(c1758.39,2429) 1781.09,2450.11 ccw(c1758.39,2429) 1758.39,2460 ; 1758.39,2460 ccw(c1758.39,2491) 1781.09,2469.89 cw(c1758.39,2491) 1758.39,2460 ; v1@1539.84,2132.11 ccw(c1517.12,2163.42) 1555.81,2163.42 cw(c1517.12,2163.42) v1@1539.84,2132.11 ; v1@1545.72,2124.01 ccw(c1531.35,2143.81) 1555.81,2143.81 cw(c1531.35,2143.81) v1@1545.72,2124.01 ; v1@1553.78,2125 ccw(c1584.44,2125) 1562.76,2103.32 cw(c1584.44,2125) v1@1553.78,2125 ; 1670.03,2525.41 cw(c1640.05,2495.43) 1682.44,2495.43 ccw(c1640.05,2495.43) 1670.03,2525.41 ; 1674.53,2520.9 ccw(c1691.06,2537.44) 1691.06,2514.06 cw(c1691.06,2537.44) 1674.53,2520.9 ; C16.1@1698.94,2476.81 cw(c1698.94,2429.29) 1732.54,2462.89 ccw(c1698.94,2429.29) C16.1@1698.94,2476.81 ; C16.1@1717.56,2495.43 ccw(c1759.95,2495.43) 1729.98,2465.46 cw(c1759.95,2495.43) C16.1@1717.56,2495.43 ; 1742.9,2401.33 ccw(c1684.23,2460) 1767.2,2460 cw(c1684.23,2460) 1742.9,2401.33 ; 1759.97,2418.4 ccw(c1718.37,2460) 1777.2,2460 cw(c1718.37,2460) 1759.97,2418.4 ; 1766.66,2425.09 cw(c1791.73,2400.02) 1791.73,2435.47 ccw(c1791.73,2400.02) 1766.66,2425.09
  Bottom Layer w10: v1(1545,2125) 1593.04,2125 1685.22,2217.18 v1@1685.22,2334.78 ; 1681.44,2325.54 cw(c1689.06,2329.94) v1@1684.53,2337.48 ; 1566.2,2125 cw(c1566.2,2146.2) 1551.21,2131.21 ccw(c1566.2,2146.2) 1566.2,2125 ; 1566.2,2125 ccw(c1566.2,2103.8) 1551.21,2118.79 cw(c1566.2,2103.8) 1566.2,2125 ; v1@1673.79,2338.79 cw(c1646.2,2311.2) 1685.22,2311.2 ccw(c1646.2,2311.2) v1@1673.79,2338.79